# Altium PCB adafruit flora neopixel.PcbDoc
Units mil, origin at the board's own origin, x right, y up, seen from the top; angles counter-clockwise.
Board outline 500 x 750 mil, 16 copper layers (Top, Route2, Route3, Route4, Route5, Route6, Route7, Route8, Route9, Route10, Route11, Route12, Route13, Route14, Route15, Bottom), stack 34.956 mil thick; 10 components, 10 nets, 26 pads, 4 vias.
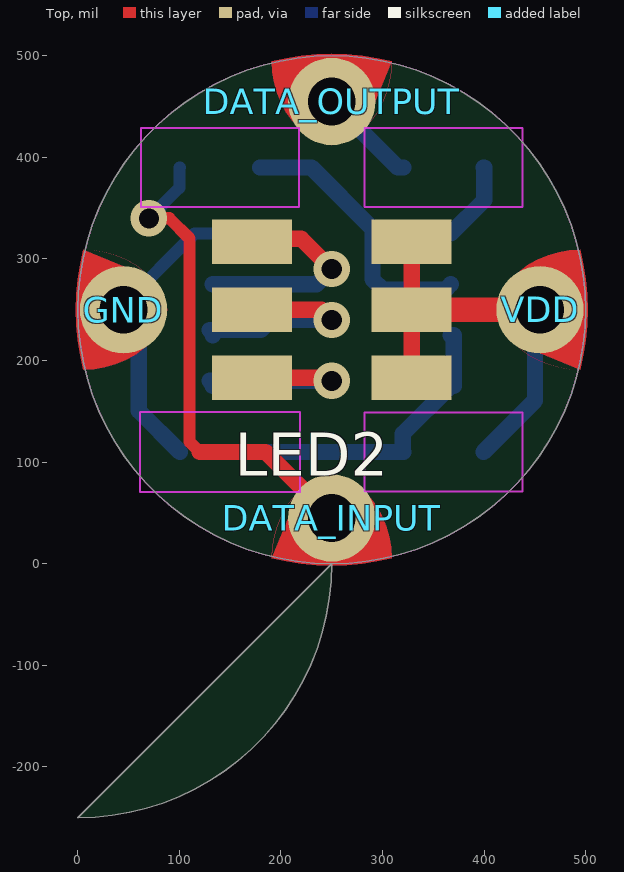
[diagram p0: Top view]
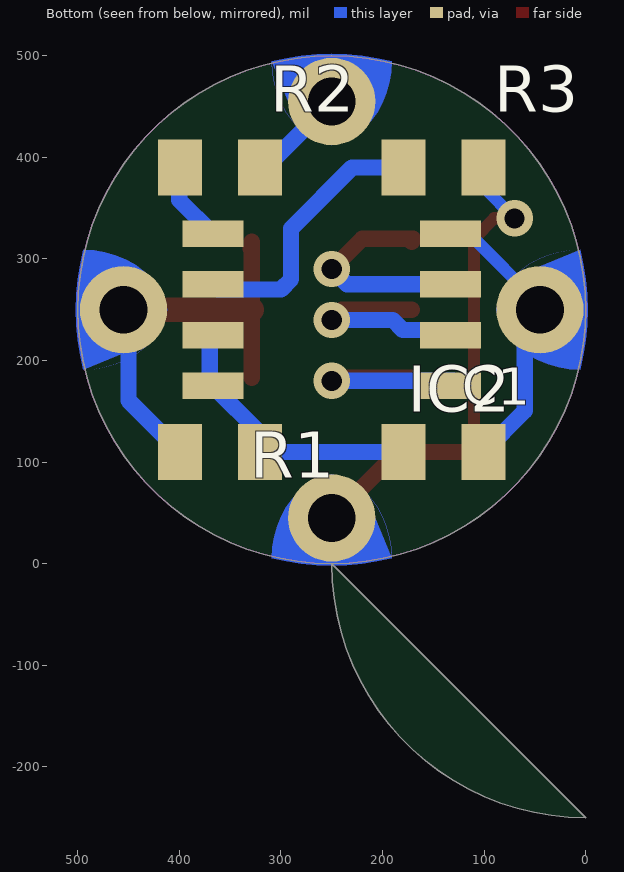
[diagram p1: Bottom view, seen from below]

## Layer stack, top to bottom
Top Solder: solder mask 0.4, Solder Resist, Dk 3.5
Top: signal copper 1.378
Dielectric 1: dielectric 12.6, FR-4, Dk 4.8
Route2: signal copper 1.4
Route3: signal copper 1.4
Route4: signal copper 1.4
Route5: signal copper 1.4
Route6: signal copper 1.4
Route7: signal copper 1.4
Route8: signal copper 1.4
Route9: signal copper 1.4
Route10: signal copper 1.4
Route11: signal copper 1.4
Route12: signal copper 1.4
Route13: signal copper 1.4
Route14: signal copper 1.4
Route15: signal copper 1.4
Bottom: signal copper 1.378
Bottom Solder: solder mask 0.4, Solder Resist, Dk 3.5

## Board outline
250,0 ccw(c250,250) 500,250 ccw(c250,250) 250,500 ccw(c250,250) 0,250 ccw(c250,250) 250,0 cw(c0,0)

## Design rules (kind name [scope] priority, off if disabled: settings)
Clearance "Clearance (Same Net)" [All] p1: gap=10 ignorepadtopadclearanceinfootprint=FALSE except(0: SMDPad-SMDPad SMDPad-THPad SMDPad-Via)
Clearance [All] p2: gap=10 ignorepadtopadclearanceinfootprint=FALSE
HoleSize [All] p1: absolutevalues=TRUE maxlimit=100000 minlimit=19 maxpercent=80.000 minpercent=20.000
HoleToHoleClearance mdDrill [All] p1: gap=8 allowstackedmicrovias=TRUE
PasteMaskExpansion mlMinCreamFrame [All] p1: expansion=0
PolygonConnect ThermalVias [IsVia] p1: connectstyle=Direct reliefconductorwidth=10 reliefentries=4 polygonreliefangle="90 Angle" airgapwidth=10
PolygonConnect [All] p2: connectstyle=Relief reliefconductorwidth=10 reliefentries=4 polygonreliefangle="90 Angle" airgapwidth=10
RoutingVias [All] p1: holewidth=19 width=35 viastyle="Through Hole" minholewidth=19 minwidth=35 maxholewidth=100 maxwidth=100
SolderMaskExpansion mlMinStopFrame [All] p1: expansion=4
Width [All] p1: maxlimit=10000 minlimit=10 preferedwidth=10
27 further rules are at their usual default settings.

## Components (designator, comment, footprint, x,y, rotation, side; value= is the part's Value field where it differs from the comment)
C1 "1uF" C0805K 140,110 r180 bottom
DATA_INPUT "" SEWINGTAP_0.5 250,45 r180 top
DATA_OUTPUT "" SEWINGTAP_0.5 250,455 r0 top
GND "" SEWINGTAP_0.5 45,250 r90 top
IC2 "WS2811-SOP8" SO08-SKINNYPADS 250,250 r90 bottom
LED2 "RGBLED5050" RGBLED5050 250,250 r180 top
R1 "1.0K" R0805 360,110 r0 bottom
R2 "22" R0805 360,390 r180 bottom
R3 "22" R0805 140,390 r180 bottom
VDD "" SEWINGTAP_0.5 455,250 r270 top

## Footprints (in the part's own frame and the unit in brackets; to place one, negate y for a bottom-side part, rotate by r counter-clockwise, add the part's x,y. Pads: shape width x height; smd on the part's side, far side on the other; paste and mask are expansions set on the pad)
C0805K [mm] "C0805K"
  rect 1.1x1.4 smd: 1(-1,0) 2(1,0)
  Bottom keep-out lines w0.05: 2,-1 -2,-1 -2,1 2,1 2,-1
  body extent -1.55,-0.7 1.55,0.7, height 1.27
R0805 [mm] "R0805"
  rect 1.1x1.4 smd: 1(-1,0) 2(1,0)
  Bottom keep-out lines w0.051: -1.973,0.983 -1.973,-0.983 1.973,-0.983 1.973,0.983 -1.973,0.983
  body extent -1.55,-0.7 1.55,0.7, height 1.27
RGBLED5050 [mm] "RGBLED5050"
  rect 2x1.1 smd: 1(-2,1.7) 2(-2,0) 3(-2,-1.7) 4(2,-1.7) 5(2,0) 6(2,1.7)
  body extent -3,-2.25 3,2.25, height 1.27
SEWINGTAP_0.5 [mil] "SEWINGTAP_0.5"
  round 86 / inner round 60 / far side round 86 hole 47.24: TAP(0,0)
  Top region: 59.06,39.37 0,47.15 -59.06,39.37 -59.06,39.37 -51.94,3.16 -31.5,-27.56 -31.5,-27.56 -16.79,-37.51 0,-43.31 0,-43.31 16.79,-37.51 31.5,-27.56 31.5,-27.56 51.94,3.16 59.06,39.37 59.06,39.37 51.94,3.16 31.5,-27.56
  Bottom region: 59.06,39.37 0,47.15 -59.06,39.37 -59.06,39.37 -51.94,3.16 -31.5,-27.56 -31.5,-27.56 -16.79,-37.51 0,-43.31 0,-43.31 16.79,-37.51 31.5,-27.56 31.5,-27.56 51.94,3.16 59.06,39.37 59.06,39.37 51.94,3.16 31.5,-27.56
  body extent -59,-43 59,47, height 150
SO08-SKINNYPADS [mil] "SO08-SKINNYPADS"
  rect 26x60 smd: 1(-75,-117.06) 2(-25,-117.06) 3(25,-117.06) 4(75,-117.06) 5(75,117.06) 6(25,117.06) 7(-25,117.06) 8(-75,117.06)
  body extent -88,-147 88,147, height 50

## Part data
C1: library part C0805K, PackageName=C0805K
DATA_INPUT DATA_OUTPUT GND VDD: library part SEWINGTAP_0.5, PackageName=SEWINGTAP_0.5
IC2: library part SO08-SKINNYPADS, PackageName=SO08-SKINNYPADS
R1 R2 R3: library part R0805, PackageName=R0805
LED2: PackageName=RGBLED5050

## Via types
v1: diameter 35.69/35.69/35.69/35.69/35.69/35.69/35.69/35.69/35.69/35.69/35.69/35.69/35.69/35.69/35.69/35.69 (per signal layer), hole 19.69, Top to Bottom, tented both sides, 4 vias

## Nets (pads, with @x,y where several pads share a name; then routed paths per layer and width w, separated by ;. In a path a pad name is that pad's centre, name@x,y a point inside that pad or via, vN(x,y) a via of type N, cw(c..) or ccw(c..) an arc to the next point about the centre after c; other vN are vias at no path point)
GND: C1.2 GND.TAP IC2.4 | length 295
  Bottom w12: GND.TAP@45,255 115,325 IC2.4
  Bottom w16: GND.TAP@40,260 45,255 GND.TAP 55,240 60,240 60,150.63 C1.2
N$1: IC2.3 LED2.4 | length 219.3
  Top w16: LED2.4 170,318.19 170,320 220,320 v1(250,290)
  Bottom w16: IC2.3 235,275 v1(250,290)
N$2: IC2.2 LED2.5 | length 213.2
  Top w16: LED2.5 240,250 v1(250,240)
  Bottom w16: IC2.2 132.94,227.06 130,230 180,230 190,240 v1(250,240)
N$3: IC2.1 LED2.6 | length 206.2
  Top w16: LED2.6 246.93,183.07 v1(250,180)
  Bottom w16: IC2.1 132.94,177.06 130,180 v1(250,180)
N$4: IC2.6 R3.1 | length 268.8
  Bottom w16: R3.1 230,390 290,330 290,280 300,270 362.06,270 IC2.6
N$5: IC2.5 R2.1 | length 79.3
  Bottom w16: IC2.5 400,357.94 400,390 R2.1
N$6: DATA_INPUT.TAP R3.2 | length 482.4
  Top w12: v1(70,340) 90,340 110,320 110,120 120,110
  Top w16: 120,110 185,110 DATA_INPUT.TAP
  Bottom w12: v1(70,340) 100,370 100,390 R3.2
N$7: DATA_OUTPUT.TAP R2.2 | length 97.6
  Bottom w16: DATA_OUTPUT.TAP 315,390 R2.2
N$8: C1.1 IC2.7 IC2.8 R1.1 | length 281.9
  Bottom w16: C1.1 R1.1 320,110.63 320,127.94 IC2.8 370,175 370,225 IC2.7
VDD: LED2.1 LED2.2 LED2.3 R1.2 VDD.TAP | length 432.7
  Top w16: LED2.1 LED2.2 ; LED2.3 328.74,311.26 330,310 328.74,308.74 LED2.2 ; LED2.2@330,255 328.74,253.74 LED2.2 ; VDD.TAP@445,250 VDD.TAP
  Top w24: LED2.2 VDD.TAP@445,250
  Bottom w16: R1.2 450,160.63 450,250 VDD.TAP

## Keep-outs
Keep-Out Layer:
  the board outline again, w0

## Silkscreen, mask and mechanical layers (free items; w line width, h text height)
Dimension:
  the board outline again, w0
Assembly Top:
  lines w10: 165,90 185,120 ; 185,30 185,120 ; 205,90 185,120 ; 310,430 330,460 ; 330,370 330,460 ; 350,430 330,460
  text "-" at 55.35,290.52 h59.5
  text "+" at 440.35,145.52 h59.5
Bottom Assembly:
  text "af" at 195,430 h34
  text "ad" at 380,430 h34
  text "!" at 70,360 h34
  text "uit" at 290,360 h34
  text "r" at 450,360 h34
  text "v1" at 280,100 h34